# Altium PCB PCB1.PcbDoc
Units mm, origin at the board's own origin, x right, y up, seen from the top; angles counter-clockwise.
Board outline 100 x 100 mm, 2 copper layers (Top Layer, Bottom Layer); 38 components, 33 nets, 131 pads, 0 vias.
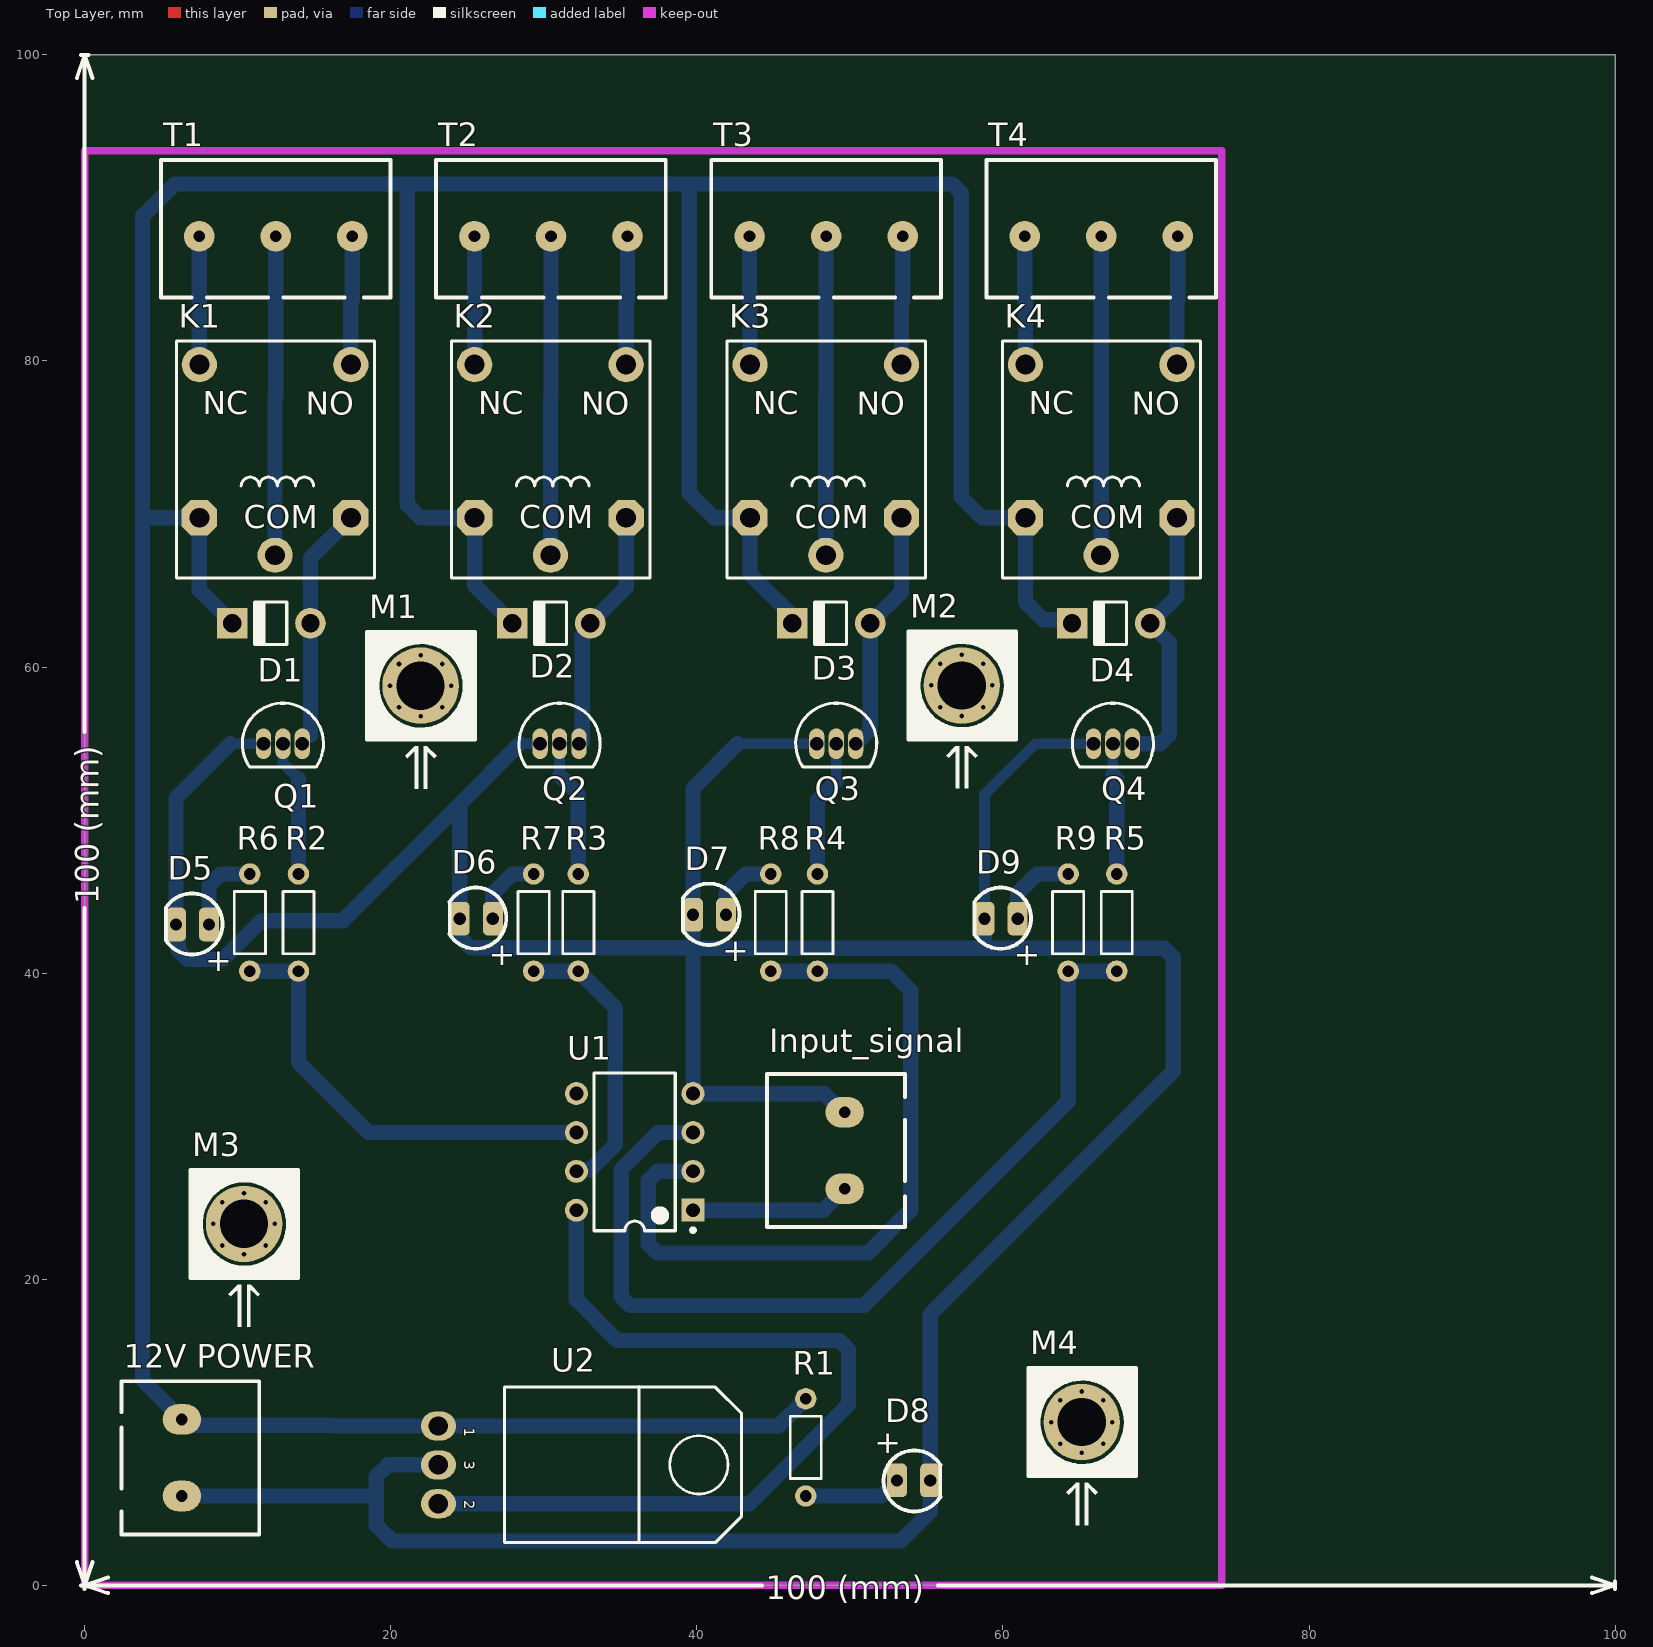
[diagram p0: Top Layer view]
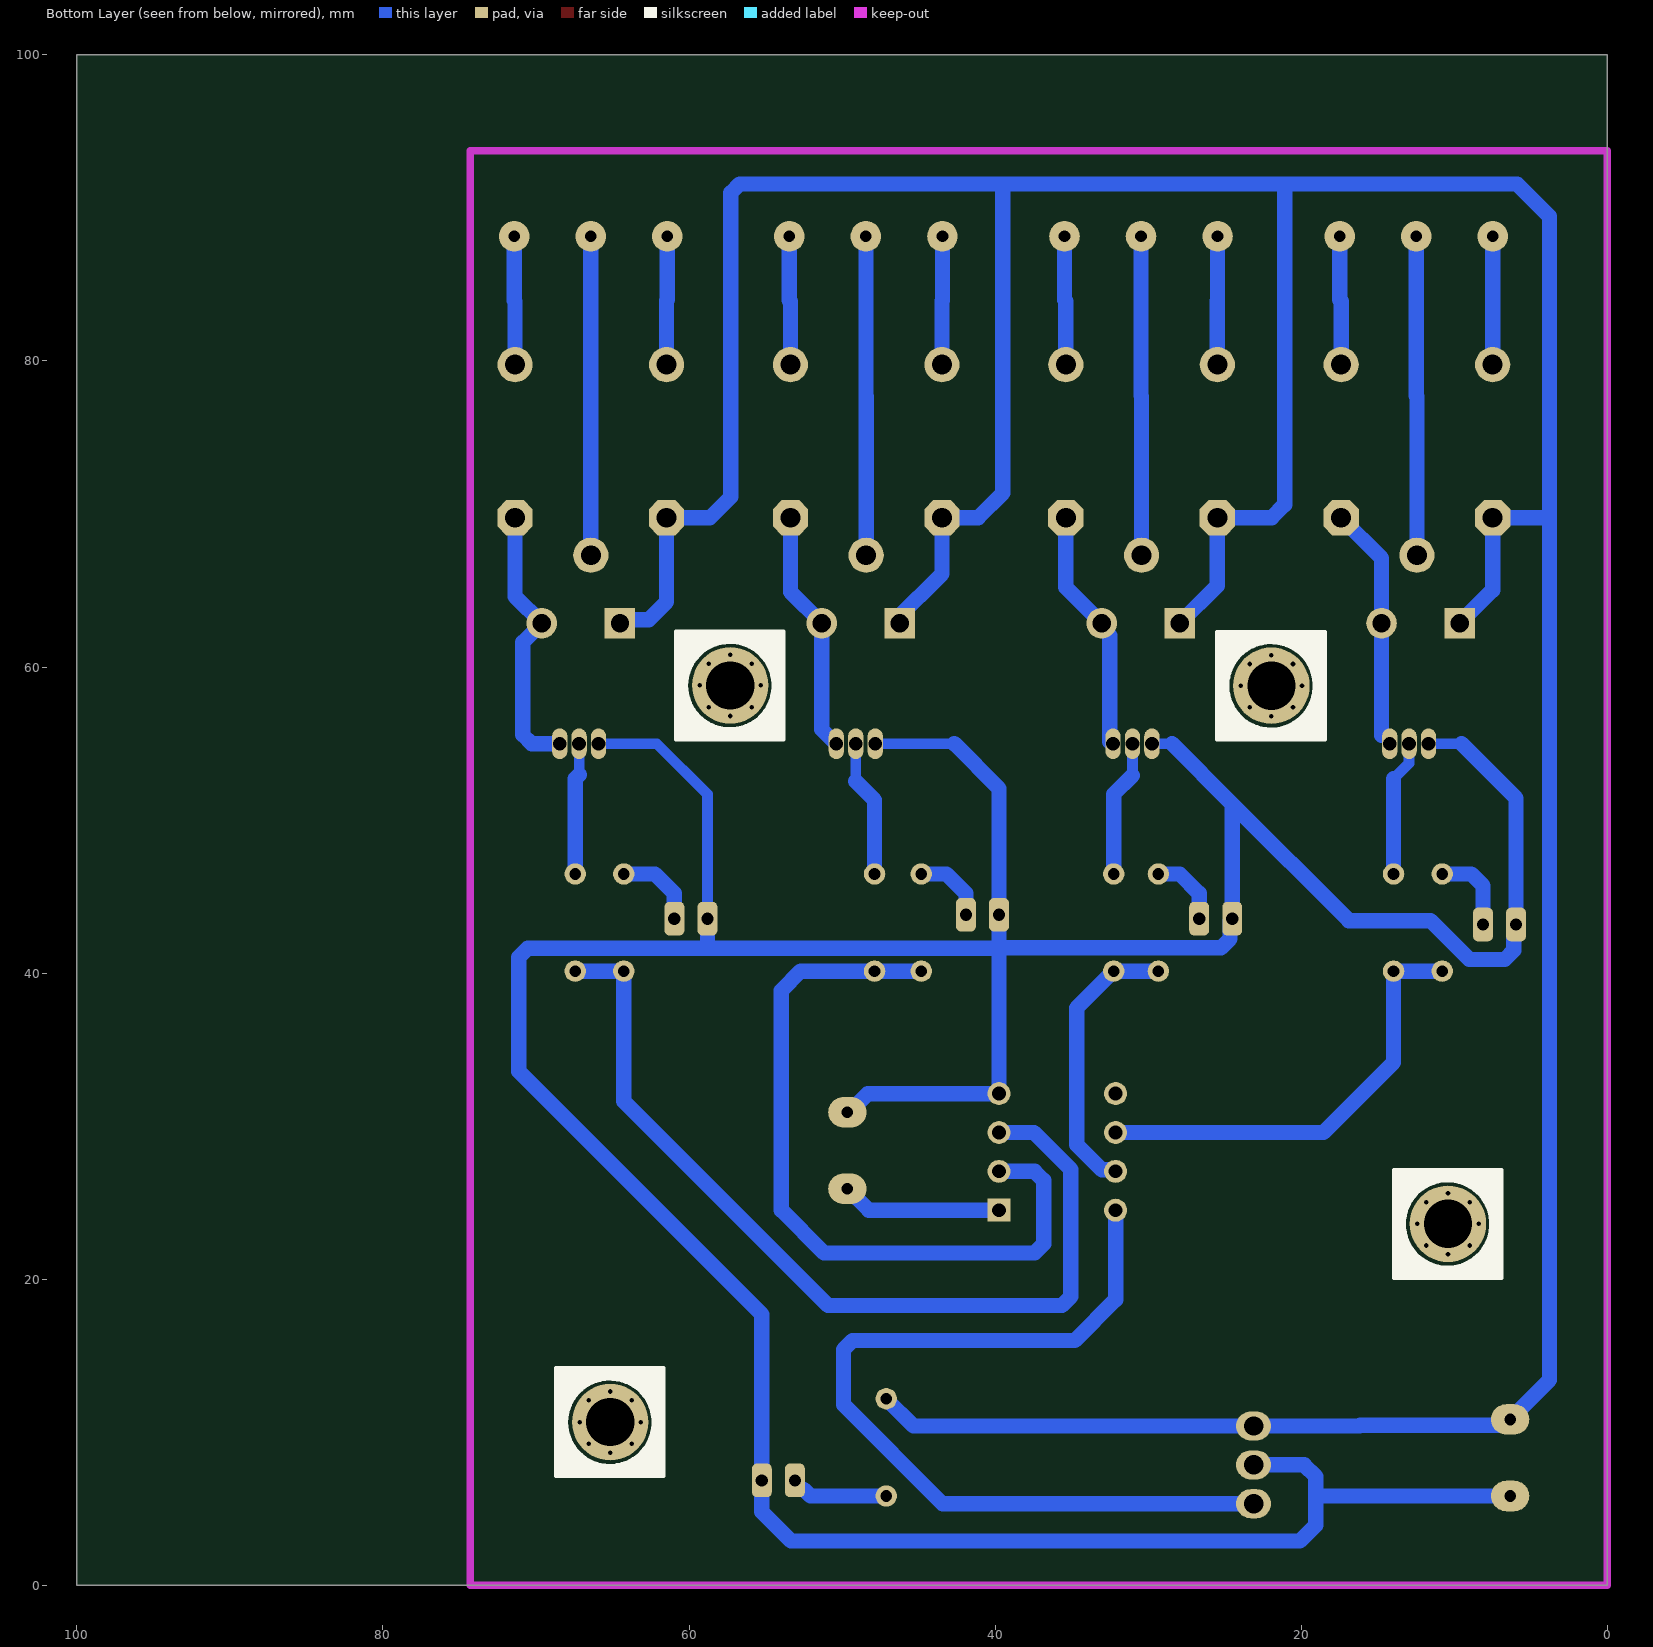
[diagram p1: Bottom Layer view, seen from below]
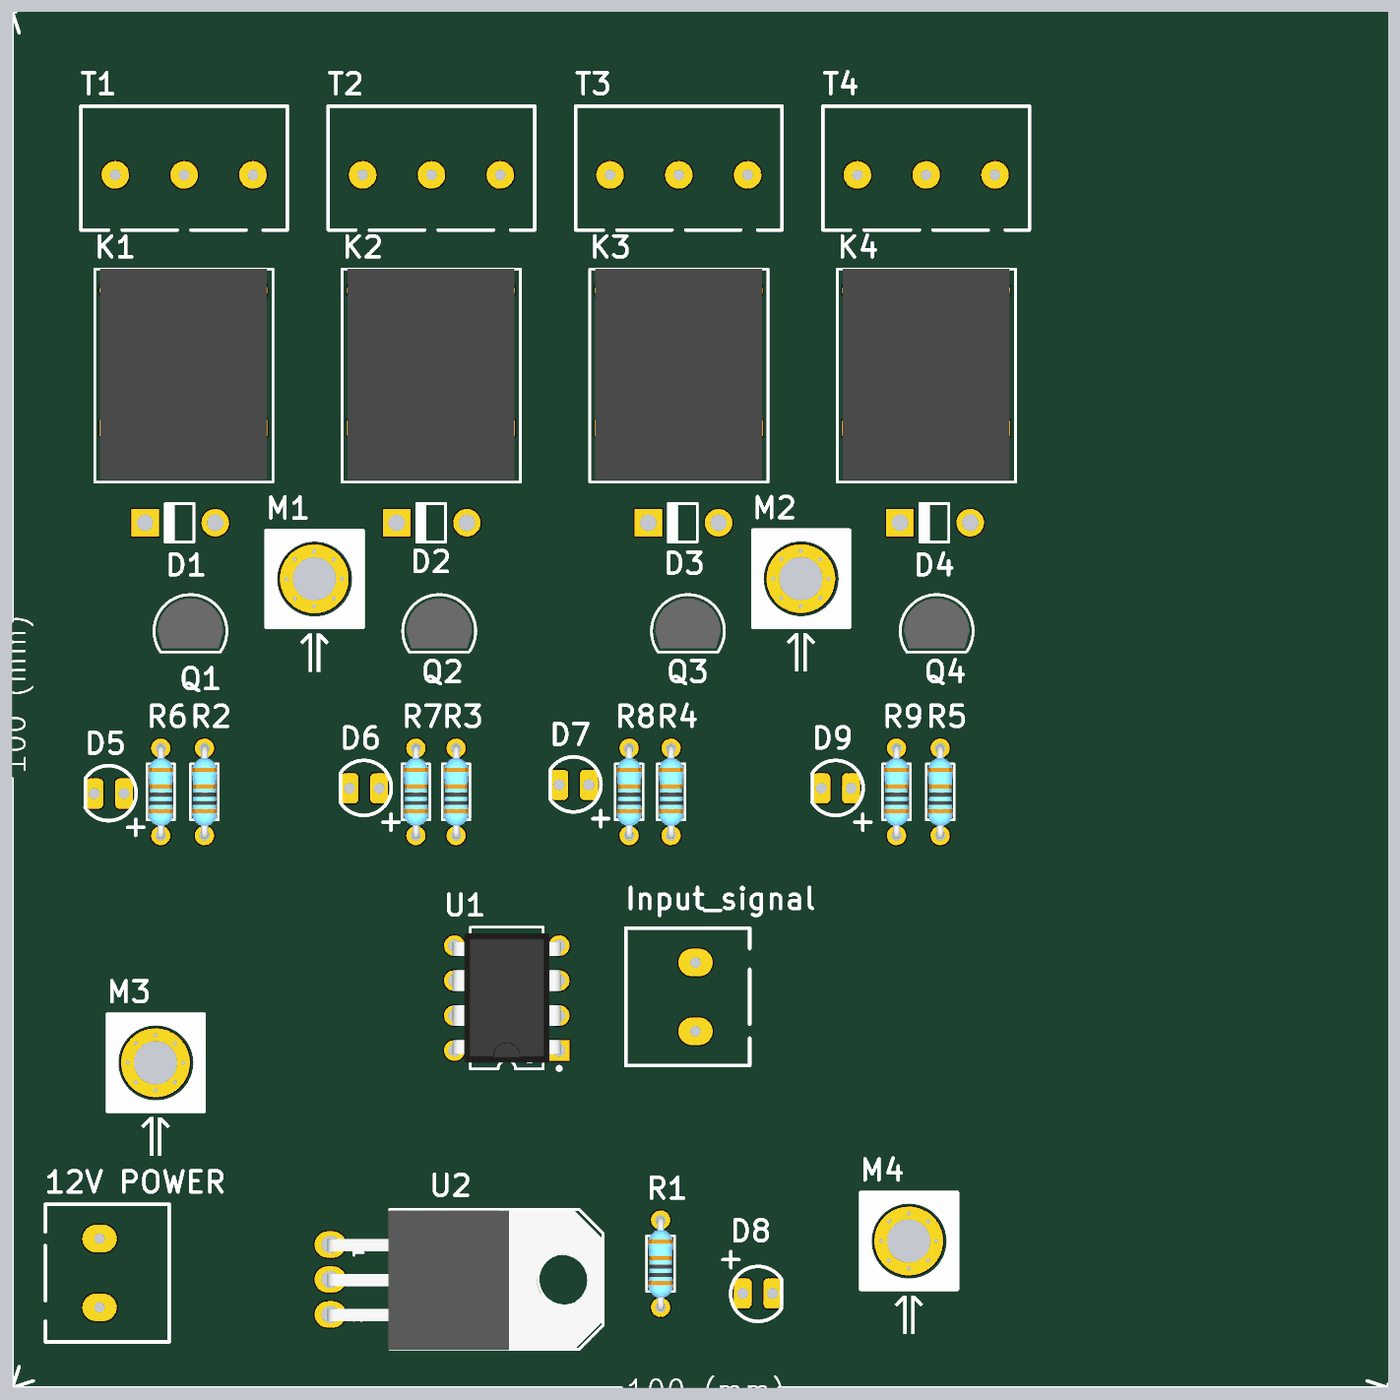
[diagram p2: 3D render of the assembled board from above, using the file's embedded part models]

## Layer stack, top to bottom
Top Solder: solder mask 0.0102, Solder Resist, Dk 3.5
Top Layer: signal copper 0.0356
Dielectric 1: dielectric 0.32, FR-4, Dk 4.8
Bottom Layer: signal copper 0.0356
Bottom Solder: solder mask 0.0102, Solder Resist, Dk 3.5

## Board outline
0,0 0,100 100,100 100,0

## Design rules (kind name [scope] priority, off if disabled: settings)
Clearance [All] p1: gap=0.3 ignorepadtopadclearanceinfootprint=TRUE
PolygonConnect [All] p1: connectstyle=Relief reliefconductorwidth=0.254 reliefentries=4 polygonreliefangle="90 Angle" airgapwidth=0.254
RoutingLayers [All] p1: top layer_v5=FALSE bottom layer_v5=TRUE
RoutingVias [All] p1: holewidth=0.711 width=1.27 viastyle="Through Hole" minholewidth=0.711 minwidth=1.27 maxholewidth=0.711 maxwidth=1.27
SolderMaskExpansion [All] p1: expansion=0.102 istentingtop=FALSE
Width [All] p1: maxlimit=1.5 minlimit=0.5 preferedwidth=1
29 further rules are at their usual default settings.

## Components (designator, comment, footprint, x,y, rotation, side; value= is the part's Value field where it differs from the comment)
"12V POWER" "Terminal" "Terminal 1*2" 2.413,13.335 r270 top
D1 "Diode 1N4007 vertical" "D 50mm" 9.525,62.865 r180 top
D2 "Diode 1N4007 vertical" "D 50mm" 27.813,62.865 r180 top
D3 "Diode 1N4007 vertical" "D 50mm" 46.101,62.865 r180 top
D4 "Diode 1N4007 vertical" "D 50mm" 64.389,62.865 r180 top
D5 "LED 3mm Red" LED-3mm 7.112,43.307 r270 top
D6 "LED 3mm Green" LED-3mm 25.654,43.688 r270 top
D7 "LED 3mm Blue" LED-3mm 40.894,43.942 r270 top
D8 "LED 5 mm Orange" LED-3mm 54.102,6.731 r90 top
D9 "LED 3mm Yellow" LED-3mm 59.944,43.688 r270 top
Input_signal "Terminal" "Terminal 1*2" 53.594,23.415 r90 top
K1 "Relay" "Relay 15.40x12.10x13.10" 12.443,67.306 r0 top
K2 "Relay" "Relay 15.40x12.10x13.10" 30.435,67.306 r0 top
K3 "Relay" "Relay 15.40x12.10x13.10" 48.426,67.306 r0 top
K4 "Relay" "Relay 15.40x12.10x13.10" 66.418,67.306 r0 top
M1 "Screw" "Board Screw" 21.954,58.784 r0 top
M2 "Screw" "Board Screw" 57.309,58.801 r0 top
M3 "Screw" "Board Screw" 10.414,23.622 r0 top
M4 "Screw" "Board Screw" 65.151,10.668 r0 top
Q1 "2N3904" "2N3904 TO92" 11.084,53.642 r0 top
Q2 "2N3904" "2N3904 TO92" 29.16,53.642 r0 top
Q3 "2N3904" "2N3904 TO92" 47.237,53.642 r0 top
Q4 "2N3904" "2N3904 TO92" 65.313,53.642 r0 top
R1 "100" Res-(1/4) 47.117,9.017 r90 top
R2 "100" Res-(1/4) 13.97,43.307 r90 top
R3 "100" Res-(1/4) 32.258,43.307 r90 top
R4 "100" Res-(1/4) 47.879,43.307 r90 top
R5 "100" Res-(1/4) 67.437,43.307 r90 top
R6 "100" Res-(1/4) 10.795,43.307 r90 top
R7 "100" Res-(1/4) 29.337,43.307 r90 top
R8 "100" Res-(1/4) 44.831,43.307 r90 top
R9 "100" Res-(1/4) 64.262,43.307 r90 top
T1 "Terminal" "Terminal 1*3" 4.993,84.138 r0 top
T2 "Terminal" "Terminal 1*3" 22.969,84.138 r0 top
T3 "Terminal" "Terminal 1*3" 40.945,84.138 r0 top
T4 "Terminal" "Terminal 1*3" 58.921,84.138 r0 top
U1 "ATtiny13A-PU" "ATtiny13A-PU 8P3" 70.485,58.166 r180 top
U2 "L7805" "78XXCV - Right" 23.114,7.874 r270 top

## Footprints (in the part's own frame and the unit in brackets; to place one, negate y for a bottom-side part, rotate by r counter-clockwise, add the part's x,y. Pads: shape width x height; smd on the part's side, far side on the other; paste and mask are expansions set on the pad)
"2N3904 TO92" [mm]
  oval 1x2 hole 0.9: 1(0.6,1.349) 2(1.87,1.349) 3(3.14,1.349)
  silkscreen extent -0.78,-0.17 4.52,4, body extent -0.51,0.1 4.25,3.73, height 9.82
"78XXCV - Right" [mil] "Right Angle"
  oval 75x90 hole 50: 1(-100,0) 2(100,0) 3(0,0)
  silkscreen extent -201,170 200,780, body extent -198,-8 202,776, height 175
"ATtiny13A-PU 8P3" [mm]
  rect 1.5x1.5 hole 0.9: 1(30.734,33.655)
  round 1.5 hole 0.9: 2(30.734,31.115) 3(30.734,28.575) 4(30.734,26.035) 5(38.354,26.035) 6(38.354,28.575) 7(38.354,31.115) 8(38.354,33.655)
  silkscreen extent 30.61,24.69 37.19,35.08, body extent 30.61,25.14 38.48,34.54, height 4.36
"Board Screw" [mm]
  round 0.6 hole 0.3: S(-2,0) S(-1.414,-1.414) S(-1.414,1.414) S(0,-2) S(0,2) S(1.414,-1.414) S(1.414,1.414) S(2,0)
  round 5 hole 3.15 mask+0.1: S(0,0)
  silkscreen extent -3.49,-6.75 3.56,3.52
"D 50mm" [mm] "50mm Pin Spacing"
  round 2 hole 1.2: 1(-5.23,0)
  rect 2x2 hole 1.2: 2(-0.127,0)
  silkscreen extent -3.68,-1.4 -1.48,1.4
LED-3mm [mm] "LED; 2 Leads"
  rrect50% 2.2x1.3 hole 0.8: 1(0.127,1.016) 2(0.127,-1.143)
  silkscreen extent -1.9,-1.81 2.09,1.89
"Relay 15.40x12.10x13.10" [mm]
  round 2.3 hole 1.3: 1(0,0) 2(-4.95,12.45) 3(4.95,12.45)
  oct 2.3x2.3 hole 1.3: 4(-4.95,2.45) 5(4.95,2.45)
  silkscreen extent -6.45,-1.5 6.5,14, body extent -6.05,-1.3 6.05,14, height 15.6
Res-(1/4) [mil]
  round 55 hole 30: 1(-125,0) 2(125,0)
  silkscreen extent -80,-40 80,40, body extent -135,-36 135,36, height 115
"Terminal 1*2" [mil]
  oval 78.74x98.43 hole 30: 1(98.15,155) 2(295,155)
  silkscreen extent 0,0 394,354
"Terminal 1*3" [mm]
  round 2 hole 0.762: 1(2.5,4) 2(7.5,4) 3(12.5,4)
  silkscreen extent 0,0 15,9

## Part data
"12V POWER" Input_signal: library part "Terminal 1*2", "Terminal 2 Pin 250VAC 16A", ComponentLinkURL=www.picpars.com, Designer="Seyed Mohsen Ghasemain", E-mail=picpars@gmail.com
D1 D2 D3 D4: "1 Amp General Purpose Rectifier", Publisher="seyed mohsen ghasemian"
D5 D6 D7 D8 D9: library part "LED 3mm", "Typical LED", Designer="Seyed Mohsen Ghasemian", PackageDescription="LED; 2 Leads", PackageReference=LED, Published=02/04/2012, Publisher=www.picpars.com
K1 K2 K3 K4: "SPDT Relay", Company=E.P.I.L, Design_Date=2011/10/31, Designer="Eng. Saeid Jorablo"
M1 M2 M3 M4: library part "Board Screw", "Board Screw With Spacer"
Q1 Q2 Q3 Q4: "npn", Collector- Base Voltage VCBO=60V, Collector- Emitter Voltage VCEO Max=40V, Collector-Emitter Saturation Voltage=0.3V, Emitter- Base Voltage VEBO=6V, Manufacturer=ONSemiconductor, Maximum DC Collector Current=0.2A, Maximum Operating Temperature=+150C, Maximum Power Dissipation=625mW, Minimum Operating Temperature=-65C, Package / Case=TO-92-3(TO-226), Package Description="3-Pin Transistor Outline, Body 4.825 x 3.685 mm, Pitch 1.27 mm", Package Reference=TO-92-3-29-11, Brand=ONSemiconductor, Configuration=Single, Datasheet URL=https://datasheet.ciiva.com/4725/2n3903-d-285841-4725808.pdf, Datasheet Version="Rev. 8, 08/2012", DC Collector/Base Gain hfe Min=60, Factory Pack Quantity=5000, Gain Bandwidth Product fT=270MHz, Manufacturer URL=http://www.onsemi.com/, Mounting Style=ThroughHole, Mounting Technology=ThroughHole, Packaging=Bulk, Product Category=BipolarTransistors-BJT, RoHS=Details, Transistor Polarity=NPN
R1 R3 R4 R5 R6 R7 R8 R9: library part Resistor, "Resistor", Power="1/4 W", Tolerance=5%
R2: library part Resistor, "Resistor", Power="1/8 W", Tolerance=5%
T1 T2 T3 T4: library part "Terminal 1*3", "Terminal 3 Pin 250VAC 16A", ComponentLinkURL=www.picpars.com, Designer="Seyed Mohsen Ghasemain", E-mail=picpars@gmail.com
U2: library part L78XXCV, "Fixed Voltage Regulator", Adding Date=1387/01/06, Company=ControTec, Designer="Saeid Jorablo"

## Nets (pads, with @x,y where several pads share a name; then routed paths per layer and width w, separated by ;. In a path a pad name is that pad's centre, name@x,y a point inside that pad or via, vN(x,y) a via of type N, cw(c..) or ccw(c..) an arc to the next point about the centre after c; other vN are vias at no path point)
+5: U1.8 U2.2 | length 58.1
  Bottom Layer w1: U2.2 43.434,5.334 49.911,11.811 49.911,15.416 49.325,16.002 34.798,16.002 32.131,18.669 U1.8
+12: "12V POWER.1" D1.2 D2.2 D3.2 D4.2 K1.4 K2.4 K3.4 K4.4 R1.2 U2.1 | length 287.8
  Bottom Layer w1: D1.2 7.493,65.024 K1.4 3.777,69.756 ; 21.082,91.44 21.082,70.612 21.938,69.756 K2.4 25.485,65.32 D2.2 ; D3.2 46.465,63.102 43.476,66.092 K3.4 41.115,69.756 39.497,71.374 39.497,91.567 ; R1.2 45.339,10.414 U2.1 16.201,10.414 16.154,10.461 6.731,10.461 6.35,10.842 3.777,13.415 3.777,69.756 ; D4.2 64.281,63.1 62.63,63.1 61.468,64.262 K4.4 58.641,69.756 57.277,71.12 57.277,90.981 56.691,91.567 39.497,91.567 ; 3.777,69.756 3.777,89.446 5.898,91.567 39.497,91.567
Arduino_pin_1: R2.1 R6.1 U1.6 | length 29.2
  Bottom Layer w1: R6.1 R2.1 13.97,34.163 18.542,29.591 U1.6
Arduino_pin_2: R3.1 R7.1 U1.7 | length 18.5
  Bottom Layer w1: R7.1 R3.1 34.671,37.719 34.671,28.795 33.023,27.147 32.227,27.147 U1.7
Arduino_pin_3: R4.1 R8.1 U1.2 | length 49.9
  Bottom Layer w1: U1.2 37.416,27.051 36.83,26.465 36.83,22.303 37.416,21.717 51.181,21.717 53.975,24.511 53.975,38.862 52.705,40.132 R4.1 R8.1
Arduino_pin_4: R5.1 R9.1 U1.3 | length 60.7
  Bottom Layer w1: U1.3 37.465,29.591 35.052,27.178 35.052,18.874 35.638,18.288 50.927,18.288 64.262,31.623 R9.1 R5.1
Arduino_pin_5: Input_signal.1 U1.1 | length 10.5
  Bottom Layer w1: U1.1 48.26,24.511 Input_signal.1
GND: "12V POWER.2" D5.2 D6.2 D7.2 D8.2 D9.2 Input_signal.2 Q1.1 Q2.1 Q3.1 Q4.1 U1.4 U2.3 | length 260.9
  Bottom Layer w0.7: 9.525,54.991 Q1.1 ; 28.448,54.991 Q2.1 ; 42.672,54.991 Q3.1 ; D9.2 58.801,51.689 62.103,54.991 Q4.1
  Bottom Layer w1: 6.35,5.842 19.05,5.842 ; 9.525,54.991 5.969,51.435 D5.2 6.119,43.03 6.119,41.48 6.705,40.894 9.017,40.894 11.557,43.434 16.891,43.434 24.511,51.054 ; U2.3 19.812,7.874 19.05,7.112 19.05,5.842 ; 28.448,54.991 24.511,51.054 ; 39.751,41.631 U1.4 48.321,32.131 49.544,30.908 Input_signal.2 ; 40.234,41.631 58.801,41.631 ; 42.672,54.991 39.751,52.07 D7.2 39.751,41.656 25.247,41.656 24.661,42.242 24.661,43.411 D6.2 24.511,51.054 ; D9.2 58.801,41.631 ; 19.05,5.842 19.05,3.937 20.091,2.896 53.34,2.896 55.245,4.801 D8.2 55.245,17.704 71.12,33.579 71.12,41.045 70.534,41.631 58.801,41.631
NetD5_1: D5.1 R6.2 | length 5.5
  Bottom Layer w1: D5.1 8.128,45.72 8.89,46.482 R6.2
NetD6_1: D6.1 R7.2 | length 4.8
  Bottom Layer w1: D6.1 26.67,45.212 27.94,46.482 R7.2
NetD7_1: D7.1 R8.2 | length 4.8
  Bottom Layer w1: D7.1 41.91,45.212 43.18,46.482 R8.2
NetD8_1: D8.1 R1.1 | length 6.7
  Bottom Layer w1: R1.1 52.07,5.842 52.486,6.258 52.936,6.258 53.086,6.408 D8.1
NetD9_1: D9.1 R9.2 | length 5.5
  Bottom Layer w1: D9.1 60.96,45.212 62.23,46.482 R9.2
NetK1_1: K1.1 T1.2 | length 20.9
  Bottom Layer w1: K1.1 12.443,77.673 12.493,77.723 T1.2
NetK1_2: K1.2 T1.1 | length 8.4
  Bottom Layer w1: K1.2 T1.1
NetK1_3: K1.3 T1.3 | length 8.4
  Bottom Layer w1: K1.3 17.393,83.896 17.493,83.996 T1.3
NetK2_1: K2.1 T2.2 | length 20.8
  Bottom Layer w1: K2.1 30.435,77.699 30.469,77.733 T2.2
NetK2_2: K2.2 T2.1 | length 8.4
  Bottom Layer w1: T2.1 25.469,83.937 25.485,83.922 K2.2
NetK2_3: K2.3 T2.3 | length 8.4
  Bottom Layer w1: K2.3 35.385,83.896 35.469,83.981 T2.3
NetK3_1: K3.1 T3.2 | length 20.8
  Bottom Layer w1: K3.1 48.426,77.699 48.445,77.717 T3.2
NetK3_2: K3.2 T3.1 | length 8.4
  Bottom Layer w1: T3.1 43.445,83.953 43.476,83.922 K3.2
NetK3_3: K3.3 T3.3 | length 8.4
  Bottom Layer w1: K3.3 53.376,83.896 53.445,83.965 T3.3
NetK4_1: K4.1 T4.2 | length 20.8
  Bottom Layer w1: K4.1 66.418,77.699 66.421,77.702 T4.2
NetK4_2: K4.2 T4.1 | length 8.4
  Bottom Layer w1: T4.1 61.421,83.994 61.468,83.947 K4.2
NetK4_3: K4.3 T4.3 | length 8.4
  Bottom Layer w1: K4.3 71.368,83.896 71.421,83.949 T4.3
NetQ1_2: Q1.2 R2.2 | length 8.9
  Bottom Layer w0.7: Q1.2 12.965,54.98 12.965,53.71 13.97,52.705
  Bottom Layer w1: R2.2 13.97,52.705
NetQ2_2: Q2.2 R3.2 | length 9
  Bottom Layer w0.7: 31.03,52.917 Q2.2
  Bottom Layer w1: 31.03,52.917 32.258,51.689 R3.2
NetQ3_2: Q3.2 R4.2 | length 9
  Bottom Layer w0.7: 49.107,52.536 Q3.2
  Bottom Layer w1: R4.2 47.879,51.308 49.107,52.536
NetQ4_2: Q4.2 R5.2 | length 8.6
  Bottom Layer w0.7: 67.183,52.959 Q4.2
  Bottom Layer w1: 67.183,52.959 67.437,52.705 R5.2
"Relay 1": D1.1 K1.5 Q1.3 | length 16.1
  Bottom Layer w0.7: Q1.3 14.755,55.522
  Bottom Layer w1: 14.755,55.522 D1.1 14.755,67.118 K1.5
"Relay 2": D2.1 K2.5 Q2.3 | length 15.8
  Bottom Layer w1: Q2.3@32.512,55.118 32.512,62.063 33.043,62.594 D2.1 35.385,65.207 K2.5
"Relay 3": D3.1 K3.5 Q3.3 | length 16
  Bottom Layer w1: Q3.3@50.407,54.991 51.331,55.915 D3.1 53.376,64.91 K3.5
"Relay 4": D4.1 K4.5 Q4.3 | length 17.9
  Bottom Layer w1: Q4.3@68.58,54.991 70.28,54.991 70.866,55.577 70.866,61.618 D4.1 71.368,64.614 K4.5
pads on no net: M1.S M2.S M3.S M4.S U1.5

## Keep-outs
Keep-Out Layer:
  lines w0.5: 0,0 74.295,0 74.295,93.726 0,93.726 0,0

## Silkscreen, mask and mechanical layers (free items; w line width, h text height)
Top Overlay:
  lines w0.254: -0.508,1.524 0,0 ; -0.508,98.476 0,100 ; -0.254,0 0.254,0 ; -0.254,100 0.254,100 ; 0,-0.254 0,0.254 ; 0,44.261 0,0 ; 0,55.739 0,100 ; 0.508,1.524 0,0 ; 0.508,98.476 0,100 ; 1.524,-0.508 0,0 ; 1.524,0.508 0,0 ; 44.261,0 0,0 ; 55.739,0 100,0 ; 98.476,-0.508 100,0 ; 98.476,0.508 100,0 ; 100,-0.254 100,0.254
  text "100 (mm)" at 0.914,44.515 h1.52 r90
  text "100 (mm)" at 44.515,-0.914 h1.52

## Text inside footprints (layer, text, board x,y; h text height)
D5: Top Overlay "+" at 7.874,40.132 h1.52
D6: Top Overlay "+" at 26.416,40.513 h1.52
D7: Top Overlay "+" at 41.656,40.767 h1.52
D8: Top Overlay "+" at 53.34,9.906 h1.52 r180
D9: Top Overlay "+" at 60.706,40.513 h1.52
K1: Top Overlay "NC" at 7.719,76.526 h1.5; Top Overlay "NO" at 14.45,76.475 h1.5; Top Overlay "COM" at 10.411,69.084 h1.5
K2: Top Overlay "NC" at 25.71,76.526 h1.5; Top Overlay "NO" at 32.441,76.475 h1.5; Top Overlay "COM" at 28.403,69.084 h1.5
K3: Top Overlay "COM" at 46.394,69.084 h1.5; Top Overlay "NO" at 50.433,76.475 h1.5; Top Overlay "NC" at 43.702,76.526 h1.5
K4: Top Overlay "NC" at 61.694,76.526 h1.5; Top Overlay "NO" at 68.425,76.475 h1.5; Top Overlay "COM" at 64.386,69.084 h1.5
U2: Top Overlay "1" at 24.814,10.287 h0.7 r270; Top Overlay "2" at 24.814,5.563 h0.7 r270; Top Overlay "3" at 24.814,8.128 h0.7 r270